# EAGLE board Tranii (EAGLE 9.0.0)

Size 160 x 100 mm. Coordinates in mm from the lower left corner, seen from the top.
Outline: 0,0 160,0 160,100 0,100 0,0
Copper layers (1*16): Top 0.035mm / dielectric 1.5mm / Bottom 0.035mm
Design rules "default": minimum track width 6mil, minimum drill 0.35mm, track to track 6mil, track to pad 6mil, pad to pad 6mil, via to via 6mil, smd to smd 6mil, copper to edge 40mil, drill to drill 6mil, minimum pad ring 10mil, minimum via ring 8mil, stop-mask expansion 4mil, vias tented up to drill 0mil, thermal gap 10mil

## Footprints (pad centres in the part's own frame; a part is rotated, then mirrored left to right if it is on the bottom)
0805-NO = smd 1.24 x 1.5: 1 -0.95,0; 2 0.95,0
1X06 = drill 1.016 pad 1.88: 1 0,0; 2 2.54,0; 3 5.08,0; 4 7.62,0; 5 10.16,0; 6 12.7,0
1X03 = drill 1.016 pad 1.88: 1 0,0; 2 2.54,0; 3 5.08,0
1X04 = drill 1.016 pad 1.88: 1 0,0; 2 2.54,0; 3 5.08,0; 4 7.62,0
1X02 = drill 1.016 pad 1.88: 1 0,0; 2 2.54,0
_1206 = smd 1.4 x 1.8: 1 -1.27,0; 2 1.27,0
DRV8833 = smd 0.3 x 1.6: AIN1 -2.275,2.8; AIN2 -1.625,2.8; AISEN -0.975,-2.8; AOUT1 -1.625,-2.8; AOUT2 -0.325,-2.8; BIN1 2.275,2.8; BIN2 1.625,2.8; BISEN 0.975,-2.8; BOUT1 1.625,-2.8; BOUT2 0.325,-2.8; GND -0.325,2.8; NFAULT 2.275,-2.8; NSLEEP -2.275,-2.8; VCP 0.975,2.8; VINT -0.975,2.8; VM 0.325,2.8 | smd 2.31 x 2.46: GNDP 0,0
ESP32 = drill 1.02: 3V -9.525,16.51; 21 -9.525,-19.05; 22 9.525,-16.51; 23 9.525,-19.05; A0 -9.525,8.89; A1 -9.525,6.35; A2 -9.525,3.81; A3 -9.525,1.27; A4 -9.525,-1.27; A5 -9.525,-3.81; A6 9.525,-13.97; A7 9.525,-11.43; A8 9.525,-8.89; A9 9.525,-6.35; A10 9.525,-3.81; A11 9.525,-1.27; A12 9.525,1.27; BAT 9.525,8.89; EN 9.525,6.35; GND -9.525,11.43; MI -9.525,-11.43; MO -9.525,-8.89; NC -9.525,13.97; RST -9.525,19.05; RX -9.525,-13.97; SCK -9.525,-6.35; TX -9.525,-16.51; USB 9.525,3.81
BSS138 = smd 1 x 1.4: D 0,1.1; G -0.95,-1.1; S 0.95,-1.1
LM3671 = smd 0.5 x 0.775: EN 0.95,-0.725; FB 0.95,0.545; GND 0,-0.725; SW -0.95,0.545; VIN -0.95,-0.725
VLS3012HBX = smd 1 x 3.4: P$1 -1.05,0; P$2 1.05,0

## Placement (x,y rotation side)
C1  0.1uF  [0805-NO]  90.17,13.97 0 top
C2  0.1uF  [0805-NO]  85.09,46.99 0 top
C3  10µF  [0805-NO]  85.09,41.91 0 top
C4  10µF  [0805-NO]  85.09,7.62 0 top
C5  4.7uF  [0805-NO]  5.08,2.54 0 top
C6  10uF  [0805-NO]  5.08,-2.54 0 top
J1  apd  [1X06]  105.41,212.09 0 top  (outside the outline)
J2  left motor encoder  [1X03]  105.41,193.04 0 top  (outside the outline)
J3  right motor encoder  [1X03]  105.41,173.99 0 top  (outside the outline)
J4  line sensor 2  [1X03]  105.41,154.94 0 top  (outside the outline)
J5  line sensor 1  [1X03]  105.41,135.89 0 top  (outside the outline)
J6  ultrasonic  [1X04]  105.41,116.84 0 top  (outside the outline)
J7  left motor output  [1X02]  105.41,97.79 0 top
J8  right motor output  [1X02]  105.41,78.74 0 top
J9  lift motor output  [1X02]  105.41,59.69 0 top
R1  0.2Ω  [_1206]  85.09,35.56 0 top
R2  0.2Ω  [_1206]  85.09,29.21 0 top
R3  0.2Ω  [_1206]  92.71,22.86 0 top
R4  0.2Ω  [_1206]  85.09,13.97 0 top
R5  10kΩ  [_1206]  1.27,-8.89 0 top  (outside the outline)
R6  10kΩ  [_1206]  1.27,-15.24 0 top  (outside the outline)
R7  47Ω  [_1206]  -2.54,-21.59 0 top  (outside the outline)
R8  91Ω  [_1206]  -2.54,-27.94 0 top  (outside the outline)
U$1  DRV8833  [DRV8833]  86.36,21.59 0 top
U$2  DRV8833  [DRV8833]  91.44,54.61 0 top
U$6  ESP32  [ESP32]  26.67,33.02 0 top
U$8  BSS138  [BSS138]  -3.81,-13.97 0 top  (outside the outline)
U$9  LM3671  [LM3671]  3.81,7.62 0 top
U$12  VLS3012HBX  [VLS3012HBX]  0,0 0 top

## Library data of the parts
C1-C6 R1-R8 = microbuilder
J1 = SparkFun-Connectors; PROD_ID: CONN-08437
J2-J5 J7-J9 = SparkFun-Connectors
J6 = SparkFun-Connectors; PROD_ID: CONN-09696
U$1 U$2 U$6 U$8 U$9 U$12 = Tranii

## Nets
3V: J2.1 J3.1 J4.2 J5.2 U$6.3V
ECHO: J6.3 R7.1
ECHO3.3: R7.2 R8.1 U$6.A9
GND: C3.2 C4.2 C5.2 C6.2 J1.4 J2.2 J3.2 J4.1 J5.1 J6.4 R1.1 R2.1 R3.1 R4.1 R8.2 U$1.GND U$1.GNDP U$2.GND U$2.GNDP U$6.GND U$9.GND
LEFT0: J7.1 U$1.AOUT2
LEFT1: J7.2 U$1.AOUT1
LEFT_A: U$1.AIN1 U$6.A1
LEFT_B: U$1.AIN2 U$6.A12
LIFT0: J9.1 U$2.AOUT1
LIFT1: J9.2 U$2.AOUT2
LIFT_A: U$2.AIN1 U$6.A7
LIFT_B: U$2.AIN2 U$6.A6
N$1: U$9.SW U$12.P$1
N$2: C6.1 U$9.FB U$12.P$2
N$3: C2.2 U$2.VCP
N$4: R1.2 U$2.BISEN
N$5: C3.1 U$2.VINT
N$6: R2.2 U$2.AISEN
N$7: C1.2 U$1.VCP
N$8: C4.1 U$1.VINT
N$9: R3.2 U$1.BISEN
N$10: R4.2 U$1.AISEN
OUT1: J4.3 U$6.A2
OUT2: J5.3 U$6.A3
RIGHT0: J8.1 U$1.BOUT1
RIGHT1: J8.2 U$1.BOUT2
RIGHT_A: U$1.BIN1 U$6.A10
RIGHT_B: U$1.BIN2 U$6.A8
SCL: J1.3 U$6.22
SDA: J1.2 U$6.23
TICKLEFT: J2.3 U$6.A4
TICKRIGHT: J3.3 U$6.A5
TRIG: J6.2 R6.2 U$8.D
TRIG3.3: R5.2 U$6.A0 U$8.S
VCC: C1.1 C2.1 C5.1 J1.6 R5.1 U$1.NSLEEP U$1.VM U$2.NSLEEP U$2.VM U$6.BAT U$8.G U$9.EN U$9.VIN
VCC5: J6.1 R6.1

## Tracks (layer width: path | path; a pad name or v marks a point on that pad's centre or on a via)
3V  (4 unrouted)
ECHO  (1 unrouted)
ECHO3.3  (2 unrouted)
GND  (20 unrouted)
LEFT0  (1 unrouted)
LEFT1  (1 unrouted)
LEFT_A  (1 unrouted)
LEFT_B  (1 unrouted)
LIFT0  (1 unrouted)
LIFT1  (1 unrouted)
LIFT_A  (1 unrouted)
LIFT_B  (1 unrouted)
N$1  (1 unrouted)
N$2  (2 unrouted)
N$3  (1 unrouted)
N$4  (1 unrouted)
N$5  (1 unrouted)
N$6  (1 unrouted)
N$7  (1 unrouted)
N$8  (1 unrouted)
N$9  (1 unrouted)
N$10  (1 unrouted)
OUT1  (1 unrouted)
OUT2  (1 unrouted)
RIGHT0  (1 unrouted)
RIGHT1  (1 unrouted)
RIGHT_A  (1 unrouted)
RIGHT_B  (1 unrouted)
SCL  (1 unrouted)
SDA  (1 unrouted)
TICKLEFT  (1 unrouted)
TICKRIGHT  (1 unrouted)
TRIG  (2 unrouted)
TRIG3.3  (2 unrouted)
VCC  (12 unrouted)
VCC5  (1 unrouted)